# Altium PCB panel.PcbDoc
Units mm, origin at the board's own origin, x right, y up, seen from the top; angles counter-clockwise.
Board outline 152.4 x 101.6 mm, 2 copper layers (Top Layer, Bottom Layer); 45 components, 0 nets, 158 pads, 18 vias.
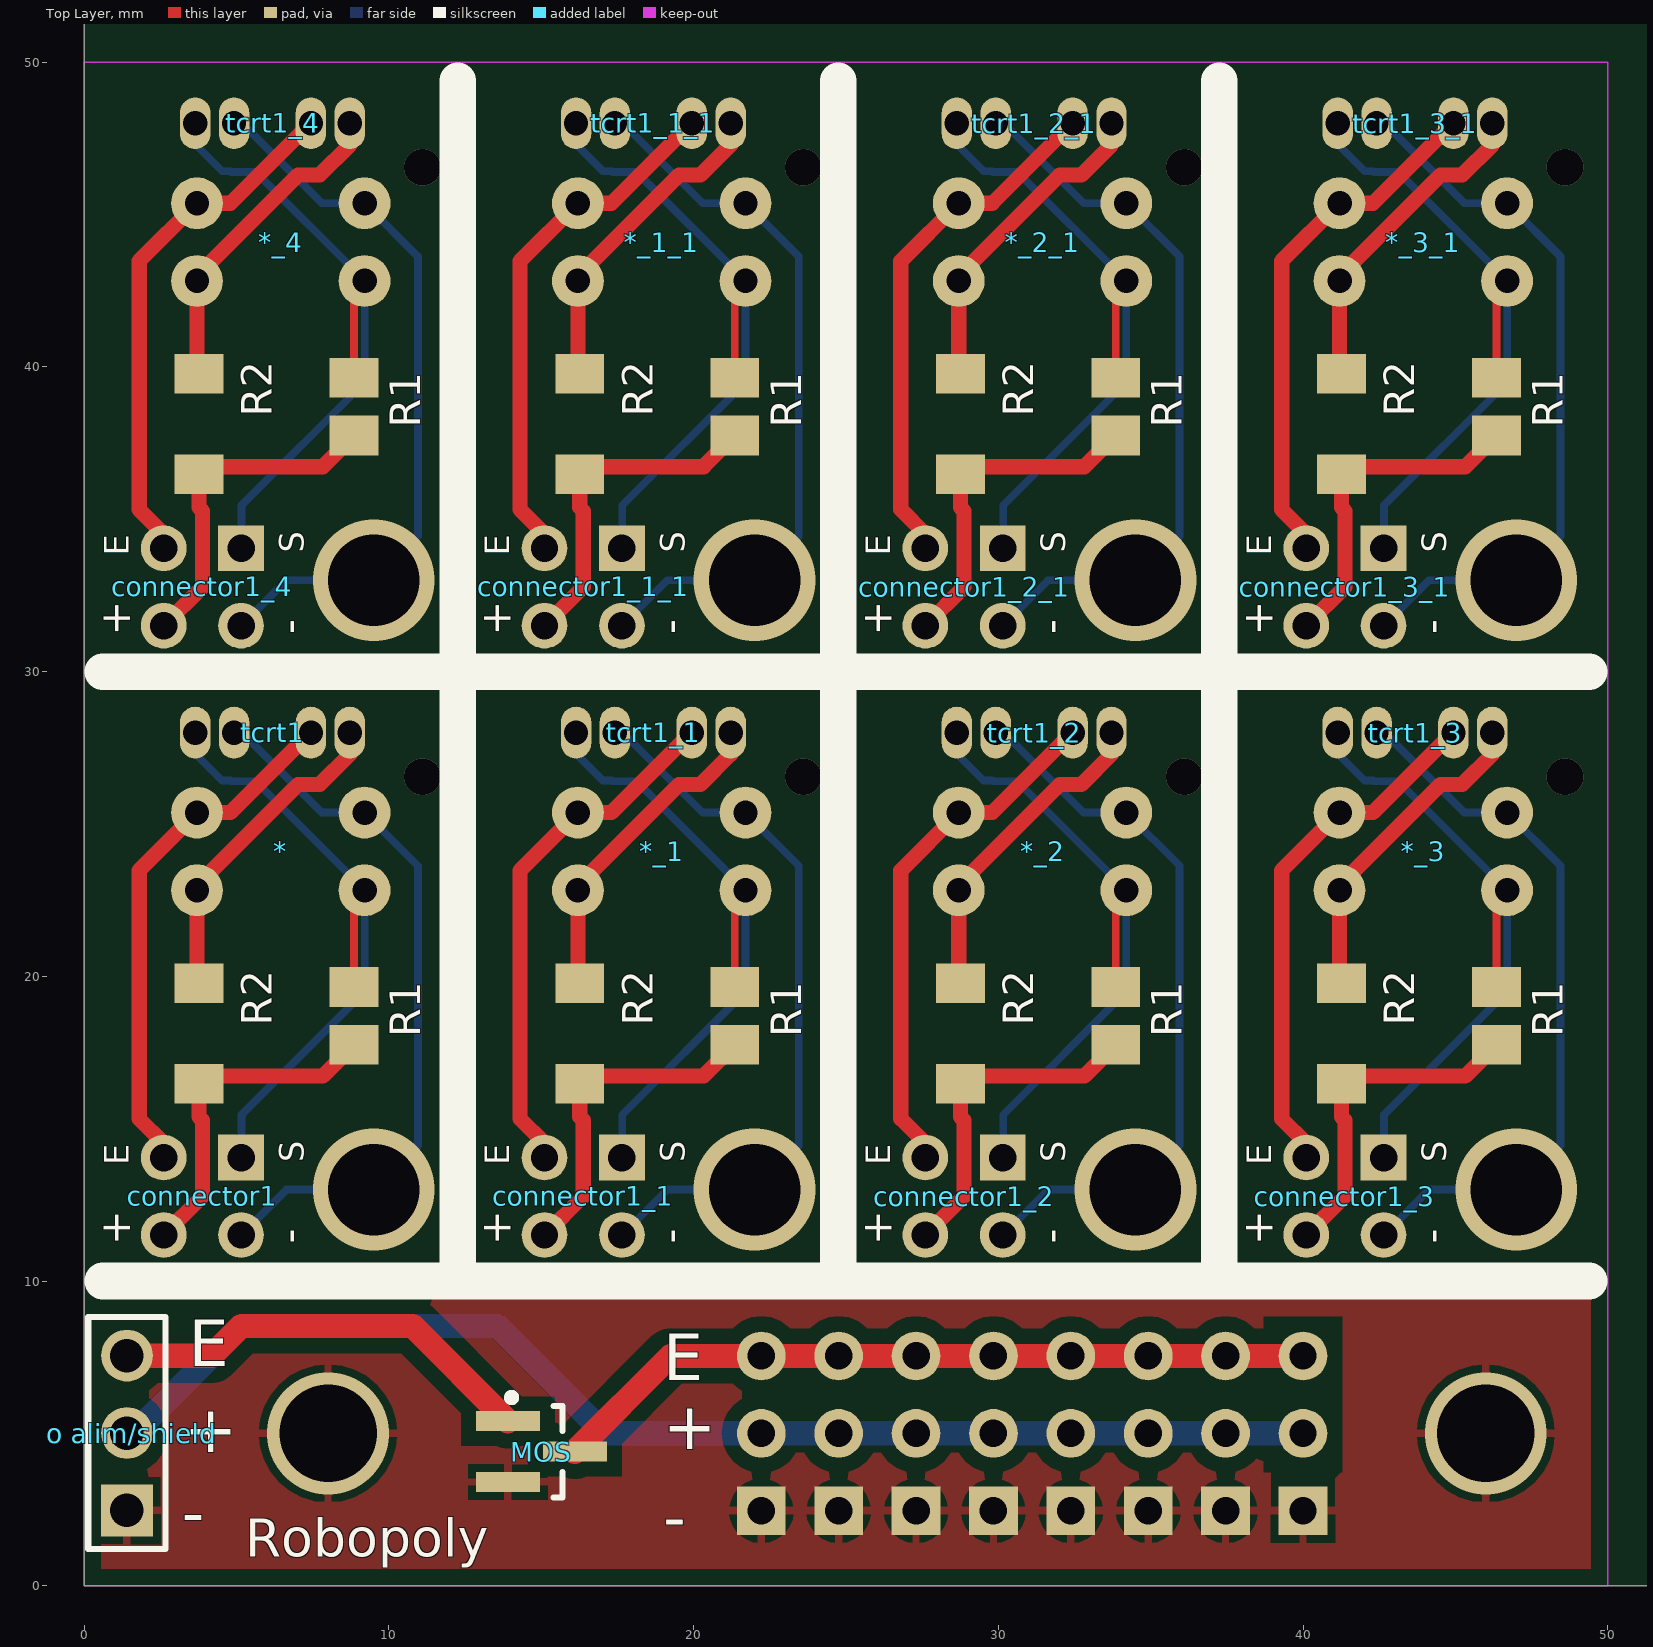
[diagram p0: Top Layer view]
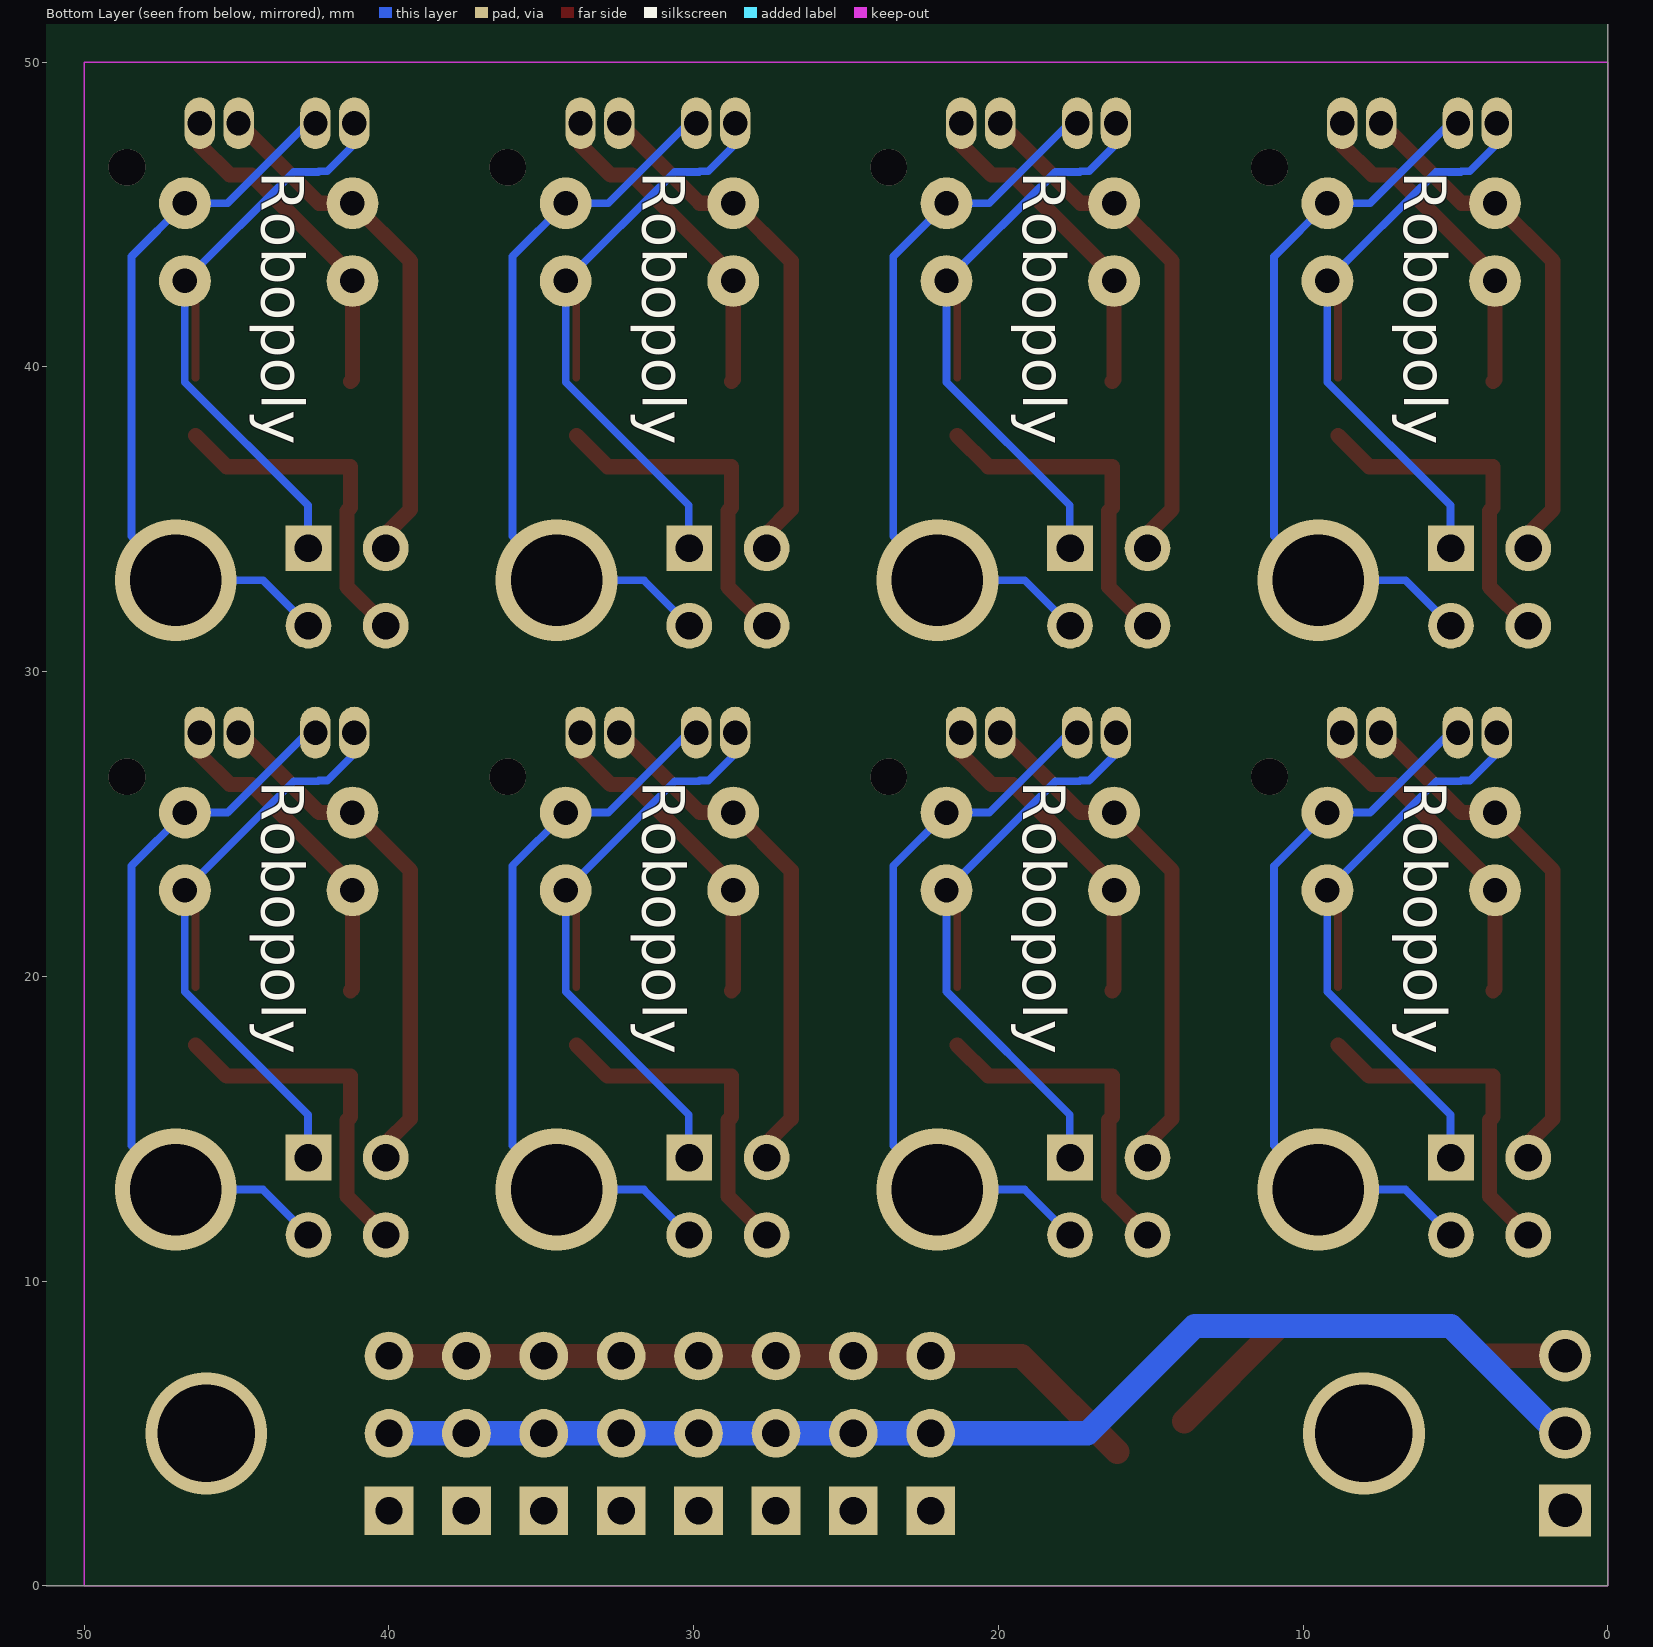
[diagram p1: Bottom Layer view, seen from below]

## Layer stack, top to bottom
Top Layer: signal copper 0.0356
Dielectric: dielectric 0.32, FR-4, Dk 4.8
Bottom Layer: signal copper 0.0356

## Board outline
0,0 152.4,0 152.4,101.6 0,101.6

## Design rules (kind name [scope] priority, off if disabled: settings)
Clearance [All] p1: gap=0.254
PolygonConnect [All] p1: connectstyle=Relief reliefconductorwidth=0.254 reliefentries=4 polygonreliefangle="90 Angle" airgapwidth=0.254
RoutingVias [All] p1: holewidth=0.711 width=1.27 viastyle="Through Hole" minholewidth=0.711 minwidth=1.27 maxholewidth=0.711 maxwidth=1.27
SolderMaskExpansion [All] p1: expansion=0.102
Width [All] p1: maxlimit=0.254 minlimit=0.254 preferedwidth=0.254
28 further rules are at their usual default settings.

## Components (designator, comment, footprint, x,y, rotation, side; value= is the part's Value field where it differs from the comment)
* "TCRT 5000" TCRT5000 6.45,24.1 r180 top
*_1 "TCRT 5000" TCRT5000 18.95,24.1 r180 top (schematic designator *)
*_1_1 "TCRT 5000" TCRT5000 18.95,44.1 r180 top (schematic designator *)
*_2 "TCRT 5000" TCRT5000 31.45,24.1 r180 top (schematic designator *)
*_2_1 "TCRT 5000" TCRT5000 31.45,44.1 r180 top (schematic designator *)
*_3 "TCRT 5000" TCRT5000 43.95,24.1 r180 top (schematic designator *)
*_3_1 "TCRT 5000" TCRT5000 43.95,44.1 r180 top (schematic designator *)
*_4 "TCRT 5000" TCRT5000 6.45,44.1 r180 top (schematic designator *)
+ "Header 8" HDR1X8#1 40,5 r180 top (schematic designator VCC)
- "Header 8" HDR1X8#2 40,2.46 r180 top (schematic designator GND)
connector1 "Header 2X2" "Header 2x2 no silk" 3.875,12.781 r180 top
connector1_1 "Header 2X2" "Header 2x2 no silk" 16.375,12.781 r180 top (schematic designator connector1)
connector1_1_1 "Header 2X2" "Header 2x2 no silk" 16.375,32.781 r180 top (schematic designator connector1)
connector1_2 "Header 2X2" "Header 2x2 no silk" 28.875,12.781 r180 top (schematic designator connector1)
connector1_2_1 "Header 2X2" "Header 2x2 no silk" 28.875,32.781 r180 top (schematic designator connector1)
connector1_3 "Header 2X2" "Header 2x2 no silk" 41.375,12.781 r180 top (schematic designator connector1)
connector1_3_1 "Header 2X2" "Header 2x2 no silk" 41.375,32.781 r180 top (schematic designator connector1)
connector1_4 "Header 2X2" "Header 2x2 no silk" 3.875,32.781 r180 top (schematic designator connector1)
E "Header 8" HDR1X8#1 40,7.54 r180 top (schematic designator ENABLE)
MOS "FDV305N" SOT23-3 15,4.4 r0 top
R1 "Res1" MELF-R2012-0805 8.85,18.7 r90 top
R1 "Res1" MELF-R2012-0805 21.35,18.7 r90 top
R1 "Res1" MELF-R2012-0805 33.85,18.7 r90 top
R1 "Res1" MELF-R2012-0805 46.35,18.7 r90 top
R1 "Res1" MELF-R2012-0805 46.35,38.7 r90 top
R1 "Res1" MELF-R2012-0805 33.85,38.7 r90 top
R1 "Res1" MELF-R2012-0805 21.35,38.7 r90 top
R1 "Res1" MELF-R2012-0805 8.85,38.7 r90 top
R2 "Res1" PCBComponent_1 3.761,18.128 r90 top
R2 "Res1" PCBComponent_1 16.261,18.128 r90 top
R2 "Res1" PCBComponent_1 28.761,18.128 r90 top
R2 "Res1" PCBComponent_1 41.261,18.128 r90 top
R2 "Res1" PCBComponent_1 41.261,38.128 r90 top
R2 "Res1" PCBComponent_1 28.761,38.128 r90 top
R2 "Res1" PCBComponent_1 16.261,38.128 r90 top
R2 "Res1" PCBComponent_1 3.761,38.128 r90 top
tcrt1 "Header 2" "TCRT 1000" 8.714,28 r180 top
tcrt1_1 "Header 2" "TCRT 1000" 21.214,28 r180 top (schematic designator tcrt1)
tcrt1_1_1 "Header 2" "TCRT 1000" 21.214,48 r180 top (schematic designator tcrt1)
tcrt1_2 "Header 2" "TCRT 1000" 33.714,28 r180 top (schematic designator tcrt1)
tcrt1_2_1 "Header 2" "TCRT 1000" 33.714,48 r180 top (schematic designator tcrt1)
tcrt1_3 "Header 2" "TCRT 1000" 46.214,28 r180 top (schematic designator tcrt1)
tcrt1_3_1 "Header 2" "TCRT 1000" 46.214,48 r180 top (schematic designator tcrt1)
tcrt1_4 "Header 2" "TCRT 1000" 8.714,48 r180 top (schematic designator tcrt1)
"to alim/shield" "Header 3" HDR1X3 1.4,7.55 r270 top

## Footprints (in the part's own frame and the unit in brackets; to place one, negate y for a bottom-side part, rotate by r counter-clockwise, add the part's x,y. Pads: shape width x height; smd on the part's side, far side on the other; paste and mask are expansions set on the pad)
HDR1X3 [mm] "Connector; Header; 3 Position"
  round 1.7 hole 1.1: 1(0,0) 2(2.54,0)
  rect 1.7x1.7 hole 1.1: 3(5.08,0)
  silkscreen extent -1.27,-1.27 6.35,1.27
HDR1X8#1 [mm] "Connector; Header; 8 Position"
  round 1.6 hole 0.9: 1(0,0) 2(2.54,0) 3(5.08,0) 4(7.62,0) 5(10.16,0) 6(12.7,0) 7(15.24,0) 8(17.78,0)
  body extent -1.25,-1.25 19.07,1.29, height 8.44
HDR1X8#2 [mm] "Connector; Header; 8 Position"
  rect 1.6x1.6 hole 0.9: 1(0,0) 2(2.54,0) 3(5.08,0) 4(7.62,0) 5(10.16,0) 6(12.7,0) 7(15.24,0) 8(17.78,0)
  body extent -1.25,-1.25 19.07,1.29, height 8.44
"Header 2x2 no silk" [mm]
  rect 1.5x1.5 hole 0.9: 1(-1.27,-1.27)
  round 1.5 hole 0.9: 2(-1.27,1.27) 3(1.27,-1.27) 4(1.27,1.27)
MELF-R2012-0805 [mm] "Metal Electrode Face (MELF) Resistor; Body 2 x 1.4 mm (LxDia)"
  rect 1.3x1.6 smd: 1(-0.95,0) 2(0.95,0)
PCBComponent_1 [mm]
  rect 1.3x1.6 smd: 1(-1.651,0) 2(1.651,0)
  body extent -1.6,-0.8 1.6,0.8, height 1
SOT23-3 [mm] "SOT23, 3-Leads, Body 3.0x2.6mm (max), Pitch 0.95mm, IPC Low Density"
  rect 2.1x0.65 smd: 1(-1.1,1) 2(-1.1,-1) 3(1.1,0)
  silkscreen extent -1.1,-1.5 0.7,1.9, body extent -1.57,-1.5 1.42,1.5, height 1.46
TCRT5000 [mm]
  round 1.7 hole 0.8: 1(2.75,1.275) 2(-2.75,1.275) 3(-2.75,-1.275) 4(2.75,-1.275)
"TCRT 1000" [mm]
  oval 1x1.7 hole 0.8: 1(0,0) 2(1.275,0) 3(3.8,0) 4(5.075,0)

## Part data
+ - E: "Header, 8-Pin"
connector1 connector1_1 connector1_1_1 connector1_2 connector1_2_1 connector1_3 connector1_3_1 connector1_4: "Header, 2-Pin, Dual row"
MOS: library part T/FDV305N, "MOSFET N SOT-23 20V 220mOhm"
R1 R1 R1 R1 R1 R1 R1 R1 R2 R2 R2 R2 R2 R2 R2 R2: "Resistor"
tcrt1 tcrt1_1 tcrt1_1_1 tcrt1_2 tcrt1_2_1 tcrt1_3 tcrt1_3_1 tcrt1_4: library part "TCRT 1000", "Header, 2-Pin"
"to alim/shield": "Header, 3-Pin"

## Via types
v1: diameter 4, hole 3, Top Layer to Bottom Layer, 8 vias
v2: diameter 1.2, hole 1.2, Top Layer to Bottom Layer, 8 vias
v3: diameter 4, hole 3.2, Top Layer to Bottom Layer, 2 vias

## Nets (pads, with @x,y where several pads share a name; then routed paths per layer and width w, separated by ;. In a path a pad name is that pad's centre, name@x,y a point inside that pad or via, vN(x,y) a via of type N, cw(c..) or ccw(c..) an arc to the next point about the centre after c; other vN are vias at no path point)
pads on no net: "to alim/shield.1" "to alim/shield.2" "to alim/shield.3" *.1 *.2 *.3 *.4 *_1.1 *_1.2 *_1.3 *_1.4 *_1_1.1 *_1_1.2 *_1_1.3 *_1_1.4 *_2.1 *_2.2 *_2.3 *_2.4 *_2_1.1 *_2_1.2 *_2_1.3 *_2_1.4 *_3.1 *_3.2 *_3.3 *_3.4 *_3_1.1 *_3_1.2 *_3_1.3 *_3_1.4 *_4.1 *_4.2 *_4.3 *_4.4 +.1 +.2 +.3 +.4 +.5 +.6 +.7 +.8 -.1 -.2 -.3 -.4 -.5 -.6 -.7 -.8 connector1.1 connector1.2 connector1.3 connector1.4 connector1_1.1 connector1_1.2 connector1_1.3 connector1_1.4 connector1_1_1.1 connector1_1_1.2 connector1_1_1.3 connector1_1_1.4 connector1_2.1 connector1_2.2 connector1_2.3 connector1_2.4 connector1_2_1.1 connector1_2_1.2 connector1_2_1.3 connector1_2_1.4 connector1_3.1 connector1_3.2 connector1_3.3 connector1_3.4 connector1_3_1.1 connector1_3_1.2 connector1_3_1.3 connector1_3_1.4 connector1_4.1 connector1_4.2 connector1_4.3 connector1_4.4 E.1 E.2 E.3 E.4 E.5 E.6 E.7 E.8 MOS.1 MOS.2 MOS.3 R1.1 R1.2 R2.1 R2.2 tcrt1.1 tcrt1.2 tcrt1.3 tcrt1.4 tcrt1_1.1 tcrt1_1.2 tcrt1_1.3 tcrt1_1.4 tcrt1_1_1.1 tcrt1_1_1.2 tcrt1_1_1.3 tcrt1_1_1.4 tcrt1_2.1 tcrt1_2.2 tcrt1_2.3 tcrt1_2.4 tcrt1_2_1.1 tcrt1_2_1.2 tcrt1_2_1.3 tcrt1_2_1.4 tcrt1_3.1 tcrt1_3.2 tcrt1_3.3 tcrt1_3.4 tcrt1_3_1.1 tcrt1_3_1.2 tcrt1_3_1.3 tcrt1_3_1.4 tcrt1_4.1 tcrt1_4.2 tcrt1_4.3 tcrt1_4.4
copper on no net: | length 766.4
  Top Layer w0.254: 8.85,19.65 8.85,22.475 9.2,22.825 ; 8.85,39.65 8.85,42.475 9.2,42.825 ; 21.35,19.65 21.35,22.475 21.7,22.825 ; 21.35,39.65 21.35,42.475 21.7,42.825 ; 33.85,19.65 33.85,22.475 34.2,22.825 ; 33.85,39.65 33.85,42.475 34.2,42.825 ; 46.35,19.65 46.35,22.475 46.7,22.825 ; 46.35,39.65 46.35,42.475 46.7,42.825
  Top Layer w0.5: 2.618,11.524 3.875,12.781 3.875,15.275 3.761,15.389 3.761,16.728 7.828,16.728 8.85,17.75 ; 2.618,14.064 2.618,14.507 1.8,15.325 1.8,23.475 3.7,25.375 4.8,25.375 7.425,28 7.439,28 ; 2.618,31.524 3.875,32.781 3.875,35.275 3.761,35.389 3.761,36.728 7.828,36.728 8.85,37.75 ; 2.618,34.064 2.618,34.507 1.8,35.325 1.8,43.475 3.7,45.375 4.8,45.375 7.425,48 7.439,48 ; 3.761,19.528 3.7,19.589 3.7,22.825 3.7,22.985 7.015,26.3 7.725,26.3 8.714,27.289 8.714,28 ; 3.761,39.528 3.7,39.589 3.7,42.825 3.7,42.985 7.015,46.3 7.725,46.3 8.714,47.289 8.714,48 ; 15.118,11.524 16.375,12.781 16.375,15.275 16.261,15.389 16.261,16.728 20.328,16.728 21.35,17.75 ; 15.118,14.064 15.118,14.507 14.3,15.325 14.3,23.475 16.2,25.375 17.3,25.375 19.925,28 19.939,28 ; 15.118,31.524 16.375,32.781 16.375,35.275 16.261,35.389 16.261,36.728 20.328,36.728 21.35,37.75 ; 15.118,34.064 15.118,34.507 14.3,35.325 14.3,43.475 16.2,45.375 17.3,45.375 19.925,48 19.939,48 ; 16.261,19.528 16.2,19.589 16.2,22.825 16.2,22.985 19.515,26.3 20.225,26.3 21.214,27.289 21.214,28 ; 16.261,39.528 16.2,39.589 16.2,42.825 16.2,42.985 19.515,46.3 20.225,46.3 21.214,47.289 21.214,48 ; 27.618,11.524 28.875,12.781 28.875,15.275 28.761,15.389 28.761,16.728 32.828,16.728 33.85,17.75 ; 27.618,14.064 27.618,14.507 26.8,15.325 26.8,23.475 28.7,25.375 29.8,25.375 32.425,28 32.439,28 ; 27.618,31.524 28.875,32.781 28.875,35.275 28.761,35.389 28.761,36.728 32.828,36.728 33.85,37.75 ; 27.618,34.064 27.618,34.507 26.8,35.325 26.8,43.475 28.7,45.375 29.8,45.375 32.425,48 32.439,48 ; 28.761,19.528 28.7,19.589 28.7,22.825 28.7,22.985 32.015,26.3 32.725,26.3 33.714,27.289 33.714,28 ; 28.761,39.528 28.7,39.589 28.7,42.825 28.7,42.985 32.015,46.3 32.725,46.3 33.714,47.289 33.714,48 ; 40.118,11.524 41.375,12.781 41.375,15.275 41.261,15.389 41.261,16.728 45.328,16.728 46.35,17.75 ; 40.118,14.064 40.118,14.507 39.3,15.325 39.3,23.475 41.2,25.375 42.3,25.375 44.925,28 44.939,28 ; 40.118,31.524 41.375,32.781 41.375,35.275 41.261,35.389 41.261,36.728 45.328,36.728 46.35,37.75 ; 40.118,34.064 40.118,34.507 39.3,35.325 39.3,43.475 41.2,45.375 42.3,45.375 44.925,48 44.939,48 ; 41.261,19.528 41.2,19.589 41.2,22.825 41.2,22.985 44.515,26.3 45.225,26.3 46.214,27.289 46.214,28 ; 41.261,39.528 41.2,39.589 41.2,42.825 41.2,42.985 44.515,46.3 45.225,46.3 46.214,47.289 46.214,48
  Top Layer w0.8: 1.4,7.55 4.173,7.55 5.148,8.525 10.775,8.525 13.9,5.4 ; 16.1,4.4 19.24,7.54 22.22,7.54 24.76,7.54 27.3,7.54 29.84,7.54 32.38,7.54 34.92,7.54 37.46,7.54 40,7.54
  Bottom Layer w0.254: 3.639,28 3.639,27.311 4.525,26.425 4.8,26.425 4.825,26.4 5.625,26.4 9.2,22.825 9.2,19.503 5.158,15.461 5.158,14.064 ; 3.639,48 3.639,47.311 4.525,46.425 4.8,46.425 4.825,46.4 5.625,46.4 9.2,42.825 9.2,39.503 5.158,35.461 5.158,34.064 ; 4.914,28 5.175,28 7.8,25.375 9.2,25.375 10.95,23.625 10.95,14.45 v1(9.5,13) 6.634,13 5.158,11.524 5.412,11.524 ; 4.914,48 5.175,48 7.8,45.375 9.2,45.375 10.95,43.625 10.95,34.45 v1(9.5,33) 6.634,33 5.158,31.524 5.412,31.524 ; 16.139,28 16.139,27.311 17.025,26.425 17.3,26.425 17.325,26.4 18.125,26.4 21.7,22.825 21.7,19.503 17.658,15.461 17.658,14.064 ; 16.139,48 16.139,47.311 17.025,46.425 17.3,46.425 17.325,46.4 18.125,46.4 21.7,42.825 21.7,39.503 17.658,35.461 17.658,34.064 ; 17.414,28 17.675,28 20.3,25.375 21.7,25.375 23.45,23.625 23.45,14.45 v1(22,13) 19.134,13 17.658,11.524 17.912,11.524 ; 17.414,48 17.675,48 20.3,45.375 21.7,45.375 23.45,43.625 23.45,34.45 v1(22,33) 19.134,33 17.658,31.524 17.912,31.524 ; 28.639,28 28.639,27.311 29.525,26.425 29.8,26.425 29.825,26.4 30.625,26.4 34.2,22.825 34.2,19.503 30.158,15.461 30.158,14.064 ; 28.639,48 28.639,47.311 29.525,46.425 29.8,46.425 29.825,46.4 30.625,46.4 34.2,42.825 34.2,39.503 30.158,35.461 30.158,34.064 ; 29.914,28 30.175,28 32.8,25.375 34.2,25.375 35.95,23.625 35.95,14.45 v1(34.5,13) 31.634,13 30.158,11.524 30.412,11.524 ; 29.914,48 30.175,48 32.8,45.375 34.2,45.375 35.95,43.625 35.95,34.45 v1(34.5,33) 31.634,33 30.158,31.524 30.412,31.524 ; 41.139,28 41.139,27.311 42.025,26.425 42.3,26.425 42.325,26.4 43.125,26.4 46.7,22.825 46.7,19.503 42.658,15.461 42.658,14.064 ; 41.139,48 41.139,47.311 42.025,46.425 42.3,46.425 42.325,46.4 43.125,46.4 46.7,42.825 46.7,39.503 42.658,35.461 42.658,34.064 ; 42.414,28 42.675,28 45.3,25.375 46.7,25.375 48.45,23.625 48.45,14.45 v1(47,13) 44.134,13 42.658,11.524 42.912,11.524 ; 42.414,48 42.675,48 45.3,45.375 46.7,45.375 48.45,43.625 48.45,34.45 v1(47,33) 44.134,33 42.658,31.524 42.912,31.524
  Bottom Layer w0.8: 1.4,5.01 1.633,5.01 5.148,8.525 13.55,8.525 17.075,5 22.22,5 24.76,5 27.3,5 29.84,5 32.38,5 34.92,5 37.46,5 40,5
  other v2: 11.1,26.55 23.6,26.55 36.1,26.55 48.6,26.55 11.1,46.55 23.6,46.55 36.1,46.55 48.6,46.55
  other v3: 8,5 46,5

## Polygon pours and split planes (outlines as drawn)
no net on Top Layer "GND plane" (solid, remove dead copper, pour order 4): 0,0 0,10 50,10 50,0 0,0

## Keep-outs
Keep-Out Layer:
  lines w0.05: 0,0 0,10 0,30 0,50 12.5,50 25,50 37.5,50 50,50 50,30 50,10 50,0 0,0

## Silkscreen, mask and mechanical layers (free items; w line width, h text height)
Top Overlay:
  lines w1.2: 0.6,10 49.4,10 ; 0.6,30 49.4,30 ; 12.25,10.5 12.25,29.5 ; 12.25,30.5 12.25,49.4 ; 24.75,10.5 24.75,29.5 ; 24.75,30.5 24.75,49.4 ; 37.25,10.5 37.25,29.5 ; 37.25,30.5 37.25,49.4
  text "S" at 7.2,33.9 h0.8 r90
  text "S" at 19.7,33.9 h0.8 r90
  text "S" at 32.2,33.9 h0.8 r90
  text "S" at 44.7,33.9 h0.8 r90
  text "E" at 1.45,33.8 h0.8 r90
  text "E" at 13.95,33.8 h0.8 r90
  text "E" at 26.45,33.8 h0.8 r90
  text "E" at 38.95,33.8 h0.8 r90
  text "-" at 7.2,31.225 h1 r90
  text "-" at 19.7,31.225 h1 r90
  text "-" at 32.2,31.225 h1 r90
  text "-" at 44.7,31.225 h1 r90
  text "+" at 1.5,31.175 h1 r90
  text "+" at 14,31.175 h1 r90
  text "+" at 26.5,31.175 h1 r90
  text "+" at 39,31.175 h1 r90
  text "S" at 7.2,13.9 h0.8 r90
  text "S" at 19.7,13.9 h0.8 r90
  text "S" at 32.2,13.9 h0.8 r90
  text "S" at 44.7,13.9 h0.8 r90
  text "E" at 1.45,13.8 h0.8 r90
  text "E" at 13.95,13.8 h0.8 r90
  text "E" at 26.45,13.8 h0.8 r90
  text "E" at 38.95,13.8 h0.8 r90
  text "-" at 7.2,11.225 h1 r90
  text "-" at 19.7,11.225 h1 r90
  text "-" at 32.2,11.225 h1 r90
  text "-" at 44.7,11.225 h1 r90
  text "+" at 1.5,11.175 h1 r90
  text "+" at 14,11.175 h1 r90
  text "+" at 26.5,11.175 h1 r90
  text "+" at 39,11.175 h1 r90
  text "E" at 3.425,7.2 h1.52
  text "+" at 3.275,4.375 h1.52
  text "-" at 3.2,1.65 h1.52
  text "Robopoly" at 5.275,0.95 h1.25
Bottom Overlay:
  text "Robopoly" at 6.675,46.425 h1.4 r90
  text "Robopoly" at 19.175,46.425 h1.4 r90
  text "Robopoly" at 31.675,46.425 h1.4 r90
  text "Robopoly" at 44.175,46.425 h1.4 r90
  text "Robopoly" at 6.675,26.425 h1.4 r90
  text "Robopoly" at 19.175,26.425 h1.4 r90
  text "Robopoly" at 31.675,26.425 h1.4 r90
  text "Robopoly" at 44.175,26.425 h1.4 r90
Mechanical 1:
  circle w0.254: c8,5 r2.7
  circle w0.254: c46,5 r2.7